# Altium PCB FPGA.PcbDoc (part 2 of 4)
Units mil, origin at the board's own origin, x right, y up, seen from the top; angles counter-clockwise.
Board outline 4000 x 2400 mil, 6 copper layers (Top Layer, InternalPlane1, MidLayer1, InternalPlane2, InternalPlane3, Bottom Layer), stack 58.8 mil thick; 235 components, 235 nets, 1406 pads, 621 vias.
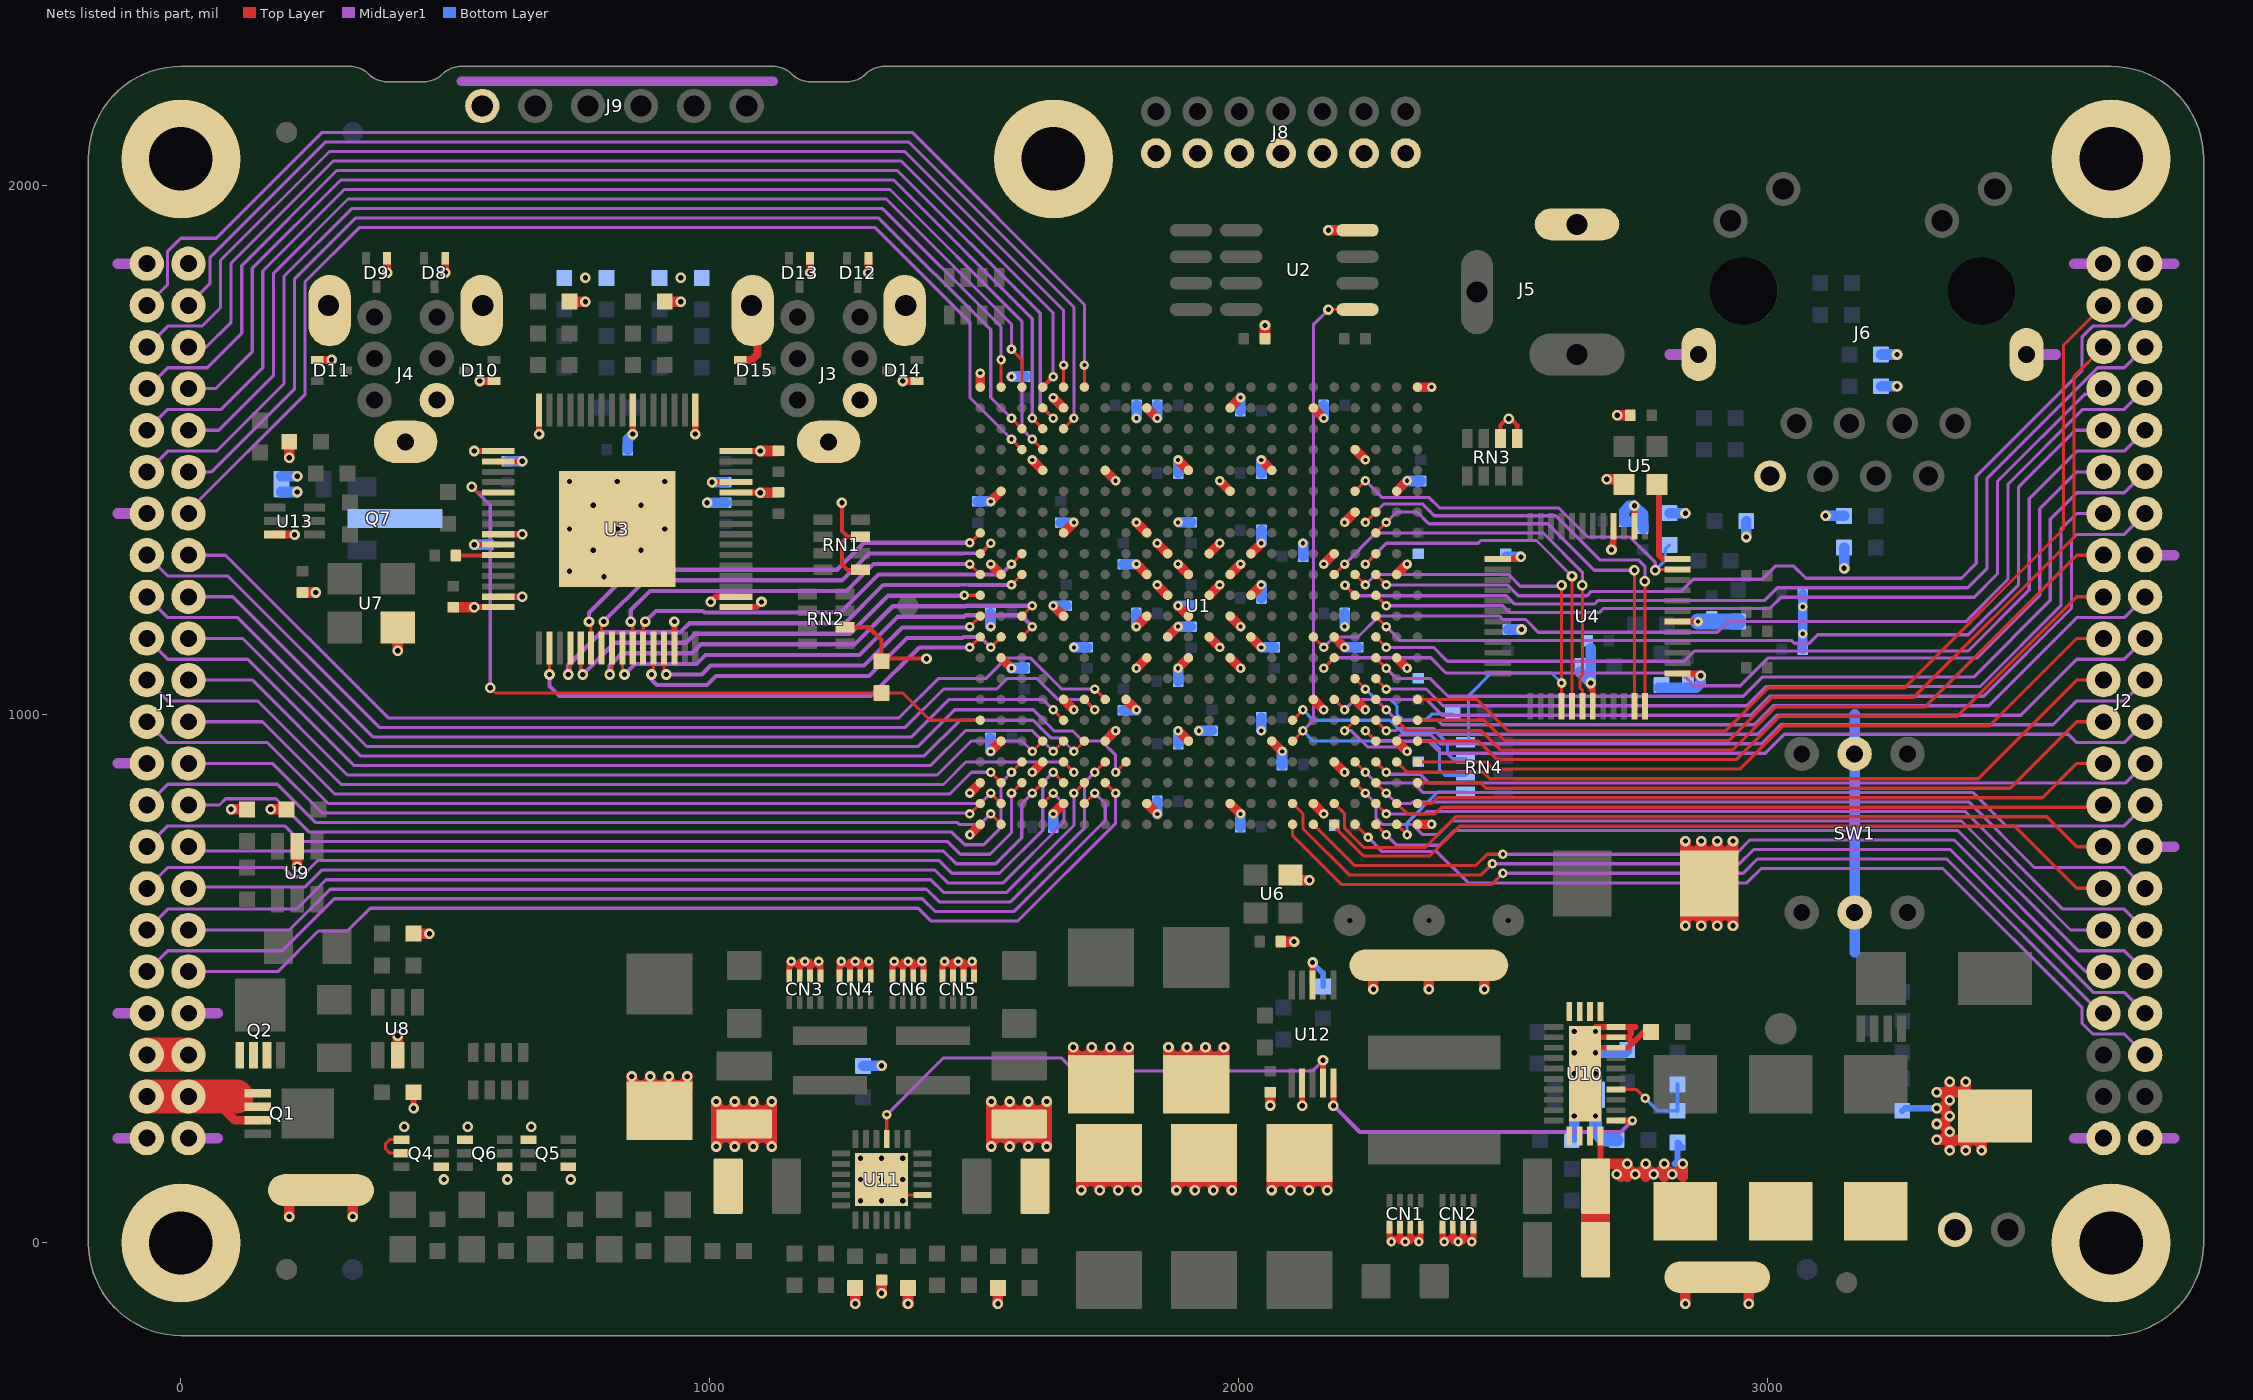
[diagram p6: the nets of this part, all layers, seen from the top]

## Via types
v1: diameter 20, hole 10, Top Layer to Bottom Layer, tented both sides, 322 vias
v2: diameter 18, hole 8, Top Layer to Bottom Layer, tented both sides, 299 vias

## Nets (pads, with @x,y where several pads share a name; then routed paths per layer and width w, separated by ;. In a path a pad name is that pad's centre, name@x,y a point inside that pad or via, vN(x,y) a via of type N, cw(c..) or ccw(c..) an arc to the next point about the centre after c; other vN are vias at no path point) (continued)
3.3V-OUT: J1.39 J1.40 Q2.1 Q2.2 Q2.3 | length 78.7
  Top Layer w65: J1.40@-64.37,355.71 J1.39@14.37,355.71
5V-OUT: J1.41 J1.42 Q1.1 Q1.2 Q1.3 | length 283.2
  Top Layer w16: 57.22,276.97 101.98,232.2 Q1.3@145,232.2 Q1.3@147.5,232.2 ; Q1.2@145,257.8 Q1.2@147.5,257.8 ; Q1.1@145,283.39 Q1.1@147.5,283.39
  Top Layer w65: J1.42@-64.37,276.97 J1.41@14.37,276.97 57.22,276.97 105,276.97
/CS: U1.Y16 U4.12 | length 884.4
  Top Layer w6: v2(2239.96,1362.48) U1.Y16@2259.65,1382.17 ; U4.12@2768.27,1015 v1(2768.27,1251.1)
  MidLayer1 w6: v2(2239.96,1362.48) 2275.02,1397.54 2347.46,1397.54 2370,1375 2600,1375 2683.8,1291.2 2757.06,1291.2 2768.27,1280 v1(2768.27,1251.1)
/ETH8: R45.1 U1.W8 | length 230.3
  Top Layer w6: U1.W8@2220.28,1067.2 v2(2239.96,1047.52)
  Bottom Layer w6: v2(2239.96,1047.52) 2259.65,1027.83 2287.17,1027.83 2299.7,1015.3 2299.7,1000.28 2310.83,989.15 2354.15,989.15 2365,1000 R45.1@2405,1000
/IRQ: RN4.8 U1.W13 U4.4 | length 932.4
  Top Layer w6: U1.W13@2220.28,1264.06 v2(2239.96,1244.37) ; U4.4@2610.79,1015 v2(2610.79,1058.9) v1@2610.79,1240
  MidLayer1 w6: v2(2239.96,1244.37) 2259.65,1264.06 2510.94,1264.06 2533,1242 v1@2610.79,1242
  Bottom Layer w6: RN4.8@2429.5,947.24 2435,952.74 2435,1035 2477.9,1077.9 2591.79,1077.9 v2(2610.79,1058.9)
  other v1: 2610.79,1244
/RD: U1.Y14 U4.5 | length 710.7
  Top Layer w6: v2(2239.96,1283.74) U1.Y14@2259.65,1303.43 ; U4.5@2630.47,1015 v1(2630.47,1261.1)
  MidLayer1 w6: v2(2239.96,1283.74) 2279.33,1323.11 2453.11,1323.11 2458.27,1328.27 2563.31,1328.27 v1(2630.47,1261.1)
/RST: R34.1 U1.A6 U3.53 | length 1401.2
  Top Layer w6: v1(550,1430) 561.1,1418.9 U3.53@600,1418.9 ; v1(585,1050) 595,1040 R34.1@1325,1040 1365,1040 1416.54,988.46 U1.A6@1511.61,988.46
  MidLayer1 w6: v1(550,1430) 585,1395 v1(585,1050)
/RST-ETH: R33.1 U1.W17 U4.23 | length 756.2
  Top Layer w6: U1.W17@2220.28,1421.54 v2(2239.96,1441.22) ; v1(2787.95,1272.2) 2789.33,1273.58 U4.23@2830,1273.58
  MidLayer1 w6: v2(2239.96,1441.22) 2271.65,1409.54 2360.46,1409.54 2380,1390 2605,1390 2660,1335 2740,1335 2787.95,1287.05 v1(2787.95,1272.2)
  Bottom Layer w6: v1(2787.95,1272.2) 2807,1291.25 2807,1312 R33.1@2815,1320
/WR: U1.V13 U4.6 | length 789.9
  Top Layer w6: U1.V13@2180.91,1264.06 v2(2200.59,1283.74) ; U4.6@2650.16,1015 2650.16,1045.4 2645.47,1050.09 2645.47,1057 2645.43,1069.96 2650.16,1074.69 v1@2650.16,1240
  MidLayer1 w6: v2(2200.59,1283.74) 2259.65,1342.8 2575.65,1342.8 2650.16,1268.29 v1(2650.16,1244) v1@2650.16,1240
/X-INIT: RN4.7 U1.T6 | length 385
  Top Layer w6: U1.T6@2102.17,988.46 v2(2121.85,1008.15)
  Bottom Layer w6: v2(2121.85,1008.15) 2141.54,988.46 2286.54,988.46 2310,965 2375,965 2395,945 2395,925.75 2405,915.75 RN4.7@2429.5,915.75
/X-PROG: RN4.5 U1.AA1 | length 185.6
  Top Layer w6: U1.AA1@2299.02,791.61 v2(2318.7,771.93)
  Bottom Layer w6: v2(2318.7,771.93) 2318.7,795 2376.46,852.76 RN4.5@2429.5,852.76
/XCS: RN4.6 U1.T5 U2.1 | length 1265.1
  Top Layer w6: U1.T5@2102.17,949.09 v2(2121.85,968.78) ; v1(2170,1765) U2.1@2225,1765
  MidLayer1 w6: v2(2121.85,968.78) 2141.54,988.46 2141.54,1736.54 v1(2170,1765)
  Bottom Layer w6: v2(2121.85,968.78) 2141.54,949.09 2365.91,949.09 2380,935 2380,895 2390.75,884.25 RN4.6@2429.5,884.25
CLK: U1.A10 U3.2 | length 940
  Top Layer w6: v1(697.05,1075) U3.2@697.05,1125 ; v2(1491.93,1126.26) U1.A10@1511.61,1145.94
  MidLayer1 w8: v1(697.05,1075) 697.05,1052.95 715,1035 1305,1035 1396.26,1126.26 v2(1491.93,1126.26)
CLK0: U11.15 U12.4 | length 976.7
  Top Layer w6: U11.15@1334.84,197 v2(1334.84,242.84)
  Top Layer w11.5: U12.4@2159.68,302.5 v1(2159.68,345.31)
  MidLayer1 w6: v2(1334.84,242.84) 1442,350 1665,350 1690,325 2139.37,325 v1(2159.68,345.31)
CLK25: U4.24 U5.3 | length 173.1
  Top Layer w11: U5.3@2791,1434 2795,1430 2795,1300.58 2802.32,1293.27 U4.24@2830,1293.27
CLK120: U10.1 U12.5 | length 668.6
  Top Layer w11: U10.1@2714,231.42 v2(2744.84,231.42)
  Top Layer w11.5: v1(2179.37,259.68) U12.5@2179.37,302.5
  MidLayer1 w8: v1(2179.37,259.68) 2229.06,210 2723.43,210 v2(2744.84,231.42)
CLK-FW: R46.2 U3.59 | length 80.3
  Top Layer w8: R46.2@520,1300 599.21,1300 U3.59@600,1300.79
CMD: U1.Y15 U4.11 | length 808
  Top Layer w6: U1.Y15@2259.65,1342.8 v2(2279.33,1362.48) ; U4.11@2748.58,1015 v1(2748.58,1272.2)
  MidLayer1 w6: v2(2279.33,1362.48) 2299.02,1382.17 2337.83,1382.17 2360,1360 2585,1360 2672.8,1272.2 v1(2748.58,1272.2)
CTL0: U1.C13 U3.4 | length 1000.1
  Top Layer w6: v1(732.42,1075) 736.42,1079 U3.4@736.42,1125 ; v2(1570.67,1244.37) U1.C13@1590.35,1264.06
  MidLayer1 w7: 1470,1244.5 1492,1244.5
  MidLayer1 w8: v1(732.42,1075) 732.42,1092.42 795,1155 945,1155 962,1172 1256,1172 1328,1244 1471,1244 ; 1491,1244 1570.3,1244 v2(1570.67,1244.37)
CTL1: U1.A12 U3.5 | length 864.9
  Top Layer w6: U3.5@756.1,1125 756.1,1079 v1(760.1,1075)
  Top Layer w7: v2(1481.61,1224.69) U1.A12@1511.61,1224.69
  MidLayer1 w8: v1(760.1,1075) 820.1,1135 955,1135 972,1152 1265,1152 1337,1224 v2@1481.61,1224
D0: U1.A15 U3.6 | length 871.2
  Top Layer w6: v1(771.79,1175) 775.79,1171 U3.6@775.79,1125 ; v2@1491.93,1323.11 U1.A15@1511.61,1342.8
  MidLayer1 w8: v1(771.79,1175) 771.79,1191.79 853,1273 1241,1273 1292,1324 v2(1491.93,1324)
D1: U1.A14 U3.7 | length 872.7
  Top Layer w6: U3.7@795.47,1125 795.47,1171 v1(799.47,1175) ; U1.A14@1511.61,1303.43 v2(1531.3,1323.11)
  MidLayer1 w7: 1480,1304 1512.19,1304 v2(1531.3,1323.11)
  MidLayer1 w8: v1(799.47,1175) 877.47,1253 1250,1253 1301,1304 1480,1304
D2: U1.C11 U3.8 | length 942.4
  Top Layer w6: v1(811.16,1075) 815.16,1079 U3.8@815.16,1125 ; U1.C11@1590.35,1185.32 v2(1610.04,1205)
  MidLayer1 w8: v1(811.16,1075) 811.16,1092.42 833.74,1115 966,1115 983,1132 1274,1132 1346,1204 1484.15,1204 1485.15,1205 v2(1610.04,1205)
D3: U1.C10 U3.9 | length 905.9
  Top Layer w6: U3.9@834.84,1125 834.84,1079 v1(838.84,1075) ; U1.C10@1590.35,1145.94 v2(1610.04,1165.63)
  MidLayer1 w8: v1(838.84,1075) 858.84,1095 975,1095 992,1112 1283,1112 1355,1184 1481,1184 1484,1187 1588.67,1187 v2(1610.04,1165.63)
D4: U1.A13 U3.10 | length 778.8
  Top Layer w6: v1(850.53,1175) 854.53,1171 U3.10@854.53,1125 ; v2(1491.93,1283.74) U1.A13@1511.61,1264.06
  MidLayer1 w8: v1(850.53,1175) 850.53,1196.53 887,1233 1259,1233 1310,1284 1491.67,1284 v2(1491.93,1283.74)
D5: U1.C14 U3.11 | length 844.7
  Top Layer w6: U3.11@874.21,1099.79 U3.11@874.21,1125 874.21,1171 v1(878.21,1175) ; v2(1570.67,1283.74) U1.C14@1590.35,1303.43
  MidLayer1 w7: 1479,1264 1550.93,1264 v2(1570.67,1283.74)
  MidLayer1 w8: v1(878.21,1175) 898.21,1195 987,1195 990,1192 1247,1192 1319,1264 1479,1264
D6: U1.B10 U3.12 | length 780.8
  Top Layer w6: v1(889.9,1075) 893.9,1079 U3.12@893.9,1125 ; v2(1531.3,1126.26) U1.B10@1550.98,1145.94
  MidLayer1 w7: 1478.06,1144 1480,1145.94 1511.61,1145.94 v2(1531.3,1126.26)
  MidLayer1 w8: v1(889.9,1075) 889.9,1065.1 900,1055 995,1055 1012,1072 1301,1072 1373,1144 1478.06,1144
D7: U1.A11 U3.13 | length 687.2
  Top Layer w6: U3.13@913.58,1125 913.58,1079 v1(917.58,1075) ; v2(1491.93,1165.63) U1.A11@1511.61,1185.32
  MidLayer1 w8: v1(917.58,1075) 985,1075 1002,1092 1292,1092 1364,1164 v2@1488.39,1164
EN: R28.1 R44.2 U10.4 | length 182.8
  Top Layer w6: U10.4@2714,290.47 2752.03,290.47 v2(2769,273.5)
  Bottom Layer w6: v2(2769,273.5) 2792.5,250 R28.1@2830,250
  Bottom Layer w8: R28.1@2830,250 R44.2@2830,300
GND: C4.2 C5.2 C6.2 C7.2 C8.2 C9.2 C11.2 C12.2 C13.2 C14.2 C15.2 C17.2 C18.2 C19.2 C20.2 C21.2 C22.2 C23.2 C24.2 C25.2 C26.2 C27.2 C28.2 C29.2 C30.2 C31.2 C32.2 C33.2 C34.2 C35.2 C36.2 C37.2 C38.2 C39.2 C40.2 C41.2 C101.2 C102.2 C103.2 C104.2 C105.2 C106.2 C107.2 C108.2 C109.2 C110.2 C111.2 C112.2 C113.2 C114.2 C115.2 C116.2 C117.2 C118.2 C119.2 C120.2 C121.2 C122.2 C123.2 C124.2 C125.2 C126.2 C127.2 C128.2 C129.2 C130.2 C131.2 C132.2 C133.2 C134.2 C135.2 C136.2 C137.2 C138.2 C139.2 C140.2 C141.2 C142.2 C143.2 C144.2 C145.2 C146.2 C147.2 C148.2 C149.2 C150.2 C151.2 C152.2 C153.2 C154.2 C155.2 C156.2 C157.2 C158.2 C159.2 C160.2 C161.2 C162.2 CN1.1 CN1.2 CN1.3 CN1.4 CN2.1 CN2.2 CN2.3 CN2.4 CN3.1 CN3.2 CN3.3 CN3.4 CN4.1 CN4.2 CN4.3 CN4.4 CN5.1 CN5.2 CN5.3 CN5.4 CN6.1 CN6.2 CN6.3 CN6.4 D1.2 D8.1 D9.1 D10.1 D11.1 D12.1 D13.1 D14.1 D15.1 J1.1 J1.2 J1.14 J1.26 J1.37 J1.38 J1.43 J1.44 J2.1 J2.2 J2.15 J2.29 J2.43 J2.44 J3.2 J3.7 J3.8 J3.9 J4.2 J4.7 J4.8 J4.9 J5.3 J6.8 J6.13 J6.14 J7.2 J8.1 J8.3 J8.5 J8.7 J8.9 J8.11 J8.13 J9.1 M1.1 M2.1 M3.1 M4.1 M5.1 pad.0@265,100 pad.0@1285,80 pad.0@1285,120 pad.0@1285,160 pad.0@1325,80 pad.0@1325,120 pad.0@1325,160 pad.0@1365,80 pad.0@1365,120 pad.0@1365,160 pad.0@2360,525 pad.0@2635,240 pad.0@2635,320 pad.0@2635,360 pad.0@2635,400 pad.0@2675,240 pad.0@2675,320 pad.0@2675,360 pad.0@2675,400 pad.0@2905,-65 pad.1 Q4.1 Q4.4 Q4.5 Q5.1 Q5.4 Q6.1 Q6.4 Q7.3 R9.2 R10.2 R11.2 R25.2 R27.2 R28.2 R29.2 R30.2 R32.2 R33.2 R34.2 R38.2 R39.2 R40.2 RN1.1 RN1.3 RN2.2 RN3.5 RN3.6 SW1.2 SW1.5 U1.A1 U1.A3 U1.A22 U1.AA5 U1.AA9 U1.AA13 U1.AA17 U1.AB1 U1.AB22 U1.B5 U1.B9 U1.B13 U1.B17 U1.D4 U1.D18 U1.E2 U1.E7 U1.E11 U1.E15 U1.E21 U1.G5 U1.G18 U1.H7 U1.J2 U1.J9 U1.J11 U1.J13 U1.J15 U1.J21 U1.K10 U1.K12 U1.K14 U1.L5 U1.L9 U1.L11 U1.L13 U1.L18 U1.M10 U1.M12 U1.M14 U1.N2 U1.N9 U1.N11 U1.N13 U1.N17 U1.N21 U1.P10 U1.P12 U1.P14 U1.R5 U1.R18 U1.U2 U1.U7 U1.U21 U1.V4 U1.V10 U1.V14 U1.W7 U1.W16 U1.W19 U2.4 U3.14 U3.17 U3.18 U3.28 U3.29 U3.32 U3.33 U3.39 U3.48 U3.49 U3.50 U3.57 U3.58 U3.63 U3.64 U3.65 U4.7 U4.13 U4.18 U4.26 U4.28 U4.37 U5.2 U6.2 U7.2 U8.2 U9.2 U10.8 U10.9 U10.10 U10.11 U10.12 U10.13 U10.14 U10.25 U10.26 U10.27 U10.28 U10.29 U11.8 U11.25 U12.2 U12.8 U13.6 | length 16369.9
  Top Layer w6: Q4.5@417.5,170 395,170 387,178 387,187.59 395,195.59 Q4.4@417.5,195.59 ; U11.25@1364,90.47 U11.8@1402,90.47
  Top Layer w8: v1(1250,1400) 1250,1346.5 1260.75,1335.75 ; RN2.2@1255.5,1164.25 1300.75,1164.25 1325,1140 R34.2@1325,1100 1330,1105 v1(1410,1105) ; RN1.1@1285.5,1272.76 1260.75,1272.76 1250,1283.5 1250,1325 1260.75,1335.75 ; RN1.3@1285.5,1335.75 1260.75,1335.75 ; RN3.6@2495.34,1519.26 2495.34,1546.52 2507.58,1558.76 v1(2511.08,1558.76) 2514.59,1558.76 2526.83,1546.52 RN3.5@2526.83,1519.26
  Top Layer w11: CN3.4@1150.47,505 v2@1150.47,532.26 ; 1150.47,517.5 cw(c1160.32,517.5) 1170.16,517.5 cw(c1180,517.5) 1189.84,517.5 cw(c1199.69,517.5) 1209.53,517.5 ; CN3.3@1170.16,505 1170.16,532.26 ; CN3.2@1189.84,505 1189.84,532.26 ; CN3.1@1209.53,505 v2@1209.53,532.26 ; CN4.4@1245.47,505 v2@1245.47,532.26 ; 1245.47,517.5 cw(c1255.32,517.5) 1265.16,517.5 cw(c1275,517.5) 1284.84,517.5 cw(c1294.69,517.5) 1304.53,517.5 ; CN4.3@1265.16,505 1265.16,532.26 ; CN4.2@1284.84,505 1284.84,532.26 ; CN4.1@1304.53,505 v2@1304.53,532.26 ; CN6.4@1345.47,505 v2@1345.47,532.26 ; 1345.47,517.5 cw(c1355.32,517.5) 1365.16,517.5 cw(c1375,517.5) 1384.84,517.5 cw(c1394.69,517.5) 1404.53,517.5 ; CN6.3@1365.16,505 1365.16,532.26 ; CN6.2@1384.84,505 1384.84,532.26 ; CN6.1@1404.53,505 v2@1404.53,532.26 ; CN5.4@1440.47,505 v2@1440.47,532.26 ; 1440.47,517.5 cw(c1450.32,517.5) 1460.16,517.5 cw(c1470,517.5) 1479.84,517.5 cw(c1489.69,517.5) 1499.53,517.5 ; CN5.3@1460.16,505 1460.16,532.26 ; CN5.2@1479.84,505 1479.84,532.26 ; CN5.1@1499.53,505 v2@1499.53,532.26 ; v2@2285.47,2.74 CN1.1@2285.47,30 ; CN1.1@2285.47,17.5 ccw(c2295.31,17.5) 2305.16,17.5 ccw(c2315,17.5) 2324.84,17.5 ccw(c2334.68,17.5) CN1.4@2344.53,17.5 ; 2305.16,2.74 CN1.2@2305.16,30 ; 2324.84,2.74 CN1.3@2324.84,30 ; v2@2344.53,2.74 CN1.4@2344.53,30 ; v2@2385.47,2.74 CN2.1@2385.47,30 ; CN2.1@2385.47,17.5 ccw(c2395.31,17.5) 2405.16,17.5 ccw(c2415,17.5) 2424.84,17.5 ccw(c2434.68,17.5) CN2.4@2444.53,17.5 ; 2405.16,2.74 CN2.2@2405.16,30 ; 2424.84,2.74 CN2.3@2424.84,30 ; v2@2444.53,2.74 CN2.4@2444.53,30 ; U4.37@2490,1293.27 2517.97,1293.27 ; v1@2531.65,1301.17 2517.97,1293.27 ; v1@2533.9,1293.27 2517.97,1293.27 ; v1@2661.95,1056.65 2669.84,1042.97 ; U4.7@2669.84,1015 2669.84,1042.97 ; v1@2669.84,1058.9 2669.84,1042.97 ; U10.29@2675,369.21 U10.8@2714,369.21 2732.5,369.21 ccw(c2732.5,379.06) 2739.46,372.1 ; U10.29@2675,388.9 U10.9@2714,388.9 2732.5,388.9 ; U10.29@2675,408.58 U10.10@2714,408.58 2732.5,408.58 ; C27.2@2684.53,150 U10.28@2684.53,202 ; v1@2701.32,1313.35 2709.21,1327.03 ; v1@2709.21,1311.1 U4.28@2709.21,1355 ; U4.26@2748.58,1355 v1(2748.58,1393.9) ; 2751,408.58 2732.5,408.58 ; C13.2@2766.36,399 2739.46,372.1 ; U4.13@2830,1076.73 2857.97,1076.73 ; U4.18@2830,1175.16 v2(2868.9,1175.16) ; v1@2871.65,1068.83 2857.97,1076.73 ; v1@2873.9,1076.73 2857.97,1076.73 ; 2732.5,388.9 ccw(c2732.5,398.74) 2732.5,408.58 ; 2732.5,388.9 cw(c2732.5,379.06) 2739.46,372.1
  Top Layer w11.5: v1(554.53,1202.36) U3.64@600,1202.36 ; v1(554.53,1320.47) U3.58@600,1320.47 ; v1(554.53,1497.64) U3.49@600,1497.64 ; U3.63@600,1222.05 v1(645.47,1222.05) ; U3.57@600,1340.16 v1(645.47,1340.16) ; U3.50@600,1477.95 v1(645.47,1477.95) ; v1(677.36,1529.53) U3.48@677.36,1575 ; v1(854.53,1529.53) U3.39@854.53,1575 ; U3.14@933.27,1125 v1(933.27,1175) ; v1(972.64,1529.53) U3.33@972.64,1575 ; v1(1002,1212.2) 1011.84,1222.05 U3.18@1050,1222.05 ; v1(1004.53,1438.58) U3.29@1050,1438.58 ; U3.17@1050,1202.36 1088.16,1202.36 v1(1098,1212.2) ; U3.28@1050,1418.9 v1(1095.47,1418.9) ; U3.32@1050,1497.64 v1(1095.47,1497.64) ; v1(2120.31,259.69) U12.2@2120.31,302.5 ; U12.8@2140,487.5 v1(2140,530.31)
  Top Layer w12: v1(440,255) C17.2@440,285
  Top Layer w15: U13.6@177.5,1339.41 v1(215,1339.41) ; D11.1@258,1670 v1(285,1670) ; v1(390,1835) D9.1@390,1862 ; v1(500,1835) D8.1@500,1862 ; v1(565,1630) D10.1@592,1630 ; D15.1@1058,1670 1080,1670 1090,1680 J3.8@1090,1766.14 ; v1(1190,1835) D13.1@1190,1862 ; v1(1300,1835) D12.1@1300,1862 ; v1(1365,1630) D14.1@1392,1630
  Top Layer w18: v2@1491.93,771.93 U1.A1@1511.61,791.61 ; v2(1491.93,850.67) U1.A3@1511.61,870.35 ; U1.A22@1511.61,1618.39 v2(1511.61,1645) ; v2(1531.3,929.41) U1.B5@1550.98,949.09 ; v2(1531.3,1283.74) U1.B13@1550.98,1264.06 ; v2(1531.3,1401.85) U1.B17@1550.98,1421.54 ; U1.B9@1550.98,1106.57 v2(1570.67,1086.89) ; v2(1610.04,890.04) U1.D4@1629.72,909.72 ; v2(1610.04,1480.59) U1.D18@1629.72,1460.91 ; v2(1649.41,811.3) U1.E2@1669.09,830.98 ; v2(1649.41,1205) U1.E11@1669.09,1185.32 ; v2(1649.41,1598.7) U1.E21@1669.09,1579.02 ; U1.E7@1669.09,1027.83 v2(1688.78,1008.15) ; U1.E15@1669.09,1342.8 v2(1688.78,1362.48) ; U1.G5@1747.83,949.09 v2(1767.52,968.78) ; U1.G18@1747.83,1460.91 v2(1767.52,1441.22) ; U1.H7@1787.2,1027.83 v2(1806.89,1008.15) ; v2(1806.89,1086.89) U1.J9@1826.57,1106.57 ; v2(1806.89,1165.63) U1.J11@1826.57,1185.32 ; v2(1806.89,1283.74) U1.J13@1826.57,1264.06 ; v2(1806.89,1362.48) U1.J15@1826.57,1342.8 ; U1.J2@1826.57,830.98 v2(1846.26,811.3) ; U1.J21@1826.57,1579.02 v2(1846.26,1559.33) ; v2(1846.26,1244.37) U1.K12@1865.94,1224.69 ; v2(1846.26,1323.11) U1.K14@1865.94,1303.43 ; U1.K10@1865.94,1145.94 v2(1885.63,1165.63) ; v2(1885.63,968.78) U1.L5@1905.31,949.09 ; v2(1885.63,1086.89) U1.L9@1905.31,1106.57 ; v2(1885.63,1205) U1.L11@1905.31,1185.32 ; v2(1885.63,1283.74) U1.L13@1905.31,1264.06 ; v2(1885.63,1480.59) U1.L18@1905.31,1460.91 ; U1.M10@1944.68,1145.94 v2(1964.37,1126.26) ; U1.M12@1944.68,1224.69 v2(1964.37,1244.37) ; U1.M14@1944.68,1303.43 v2(1964.37,1323.11) ; v2(1964.37,1441.22) U1.N17@1984.06,1421.54 ; U1.N2@1984.06,830.98 v2(2003.74,811.3) ; U1.N9@1984.06,1106.57 v2(2003.74,1086.89) ; U1.N11@1984.06,1185.32 v2(2003.74,1165.63) ; U1.N13@1984.06,1264.06 v2(2003.74,1283.74) ; U1.N21@1984.06,1579.02 v2(2003.74,1598.7) ; U1.P10@2023.43,1145.94 v2(2043.11,1126.26) ; U1.P12@2023.43,1224.69 v2(2043.11,1244.37) ; U1.P14@2023.43,1303.43 v2(2043.11,1323.11) ; v2(2043.11,1480.59) U1.R18@2062.8,1460.91 ; U1.R5@2062.8,949.09 v2(2082.48,929.41) ; U1.U2@2141.54,830.98 v2(2161.22,811.3) ; U1.U7@2141.54,1027.83 v2(2161.22,1008.15) ; U1.U21@2141.54,1579.02 v2(2161.22,1559.33) ; v2(2161.22,1283.74) U1.V14@2180.91,1303.43 ; U1.V4@2180.91,909.72 v2(2200.59,890.04) ; U1.V10@2180.91,1145.94 v2(2200.59,1126.26) ; v2(2200.59,1362.48) U1.W16@2220.28,1382.17 ; U1.W7@2220.28,1027.83 v2(2239.96,1008.15) ; U1.W19@2220.28,1500.28 v2(2239.96,1480.59) ; U1.AA5@2299.02,949.09 v2(2318.7,929.41) ; U1.AA9@2299.02,1106.57 v2(2318.7,1086.89) ; U1.AA13@2299.02,1264.06 v2(2318.7,1283.74) ; U1.AA17@2299.02,1421.54 v2(2318.7,1441.22) ; U1.AB1@2338.39,791.61 v2(2365,791.61) ; U1.AB22@2338.39,1618.39 v2(2365,1618.39)
  Top Layer w20: v1(95,820) C9.2@125,820 ; v1(170,820) C18.2@200,820 ; v1(205,50) pad.0@205,85 ; v1(205,1485) R25.2@205,1515 ; v1(220,711.5) U9.2@220,750 ; C109.2@230,1230 v1(255,1230) ; v1(325,50) pad.0@325,75 ; U8.2@410,355 v1(410,392) ; v1(410,1120) U7.2@410,1164 ; C8.2@440,585 v1(470,585) ; C105.2@515,1202 515.36,1202.36 v1(554.53,1202.36) ; C15.2@735,1780 v1(765,1780) ; C32.2@852.5,290 v1(852.5,315) ; C32.2@887.5,290 v1(887.5,315) ; C14.2@915,1780 v1(945,1780) ; C32.2@922.5,290 v1@922.5,314.94 ; v1(922.5,315) v1@922.5,314.94 ; C32.2@957.5,290 v1(957.5,315) ; C30.2@1047.5,207.5 v1(1047.5,182.5) ; C30.2@1047.5,242.5 v1(1047.5,267.5) ; C30.2@1082.5,207.5 v1(1082.5,182.5) ; C30.2@1082.5,242.5 v1(1082.5,267.5) ; v1(1095.47,1418.9) 1129.69,1418.9 C108.2@1130,1419.21 ; v1(1095.47,1497.64) C104.2@1127.64,1497.64 ; v1(1275,-115) R40.2@1275,-85 ; v1(1325,-95) C101.2@1325,-70 ; v1(1375,-115) R38.2@1375,-85 ; v1(1545,-115) R30.2@1545,-85 ; C31.2@1567.5,207.5 v1(1567.5,182.5) ; C31.2@1567.5,242.5 v1(1567.5,267.5) ; C31.2@1602.5,207.5 v1(1602.5,182.5) ; C31.2@1602.5,242.5 v1(1602.5,267.5) ; C34.2@1687.5,345 v1(1687.5,370) ; C36.2@1702.5,125 v1(1702.5,100) ; C34.2@1722.5,345 v1(1722.5,370) ; C36.2@1737.5,125 v1(1737.5,100) ; C34.2@1757.5,345 v1(1757.5,370) ; C36.2@1772.5,125 v1(1772.5,100) ; C34.2@1792.5,345 v1(1792.5,370) ; C36.2@1807.5,125 v1(1807.5,100) ; C33.2@1867.5,345 v1(1867.5,370) ; C37.2@1882.5,125 v1(1882.5,100) ; C33.2@1902.5,345 v1(1902.5,370) ; C37.2@1917.5,125 v1(1917.5,100) ; C33.2@1937.5,345 v1(1937.5,370) ; C37.2@1952.5,125 v1(1952.5,100) ; C33.2@1972.5,345 v1(1972.5,370) ; C37.2@1987.5,125 v1(1987.5,100) ; C106.2@2050,1710 v1(2050,1735) ; v1(2060,260) C102.2@2060,285 ; C38.2@2062.5,125 v1(2062.5,100) ; C107.2@2080,570 v1(2105,570) ; C38.2@2097.5,125 v1(2097.5,100) ; U6.2@2101,686 v1(2134,686) ; C38.2@2132.5,125 v1(2132.5,100) ; C38.2@2167.5,125 v1(2167.5,100) ; v1(2170,1915) U2.4@2230,1915 ; v1(2255,480) pad.0@2255,505 ; v1(2360,480) pad.0@2360,505 ; v1(2465,480) pad.0@2465,505 ; C27.2@2695,150 v1(2735,150) ; v1(2696,1444) U5.2@2729,1444 ; v1(2716,1565) C103.2@2741,1565 ; v1@2722.5,125 2722.5,150 ; 2735,125 v1(2735,150) ; 2770,125 v1(2770,150) ; 2805,125 v1(2805,150) ; 2840,125 v1(2840,150) ; v1(2845,-115) pad.0@2845,-80 ; v1(2845,600) v1@2845,605 ; C35.2@2845,625 v1@2845,605 ; C35.2@2845,735 v1@2845,755 ; v1(2845,760) v1@2845,755 ; v1(2875,600) v1@2875,605 ; v1(2875,760) v1@2875,755 ; v1(2905,600) v1@2905,605 ; v1(2905,760) v1@2905,755 ; v1(2935,600) v1@2935,605 ; C35.2@2935,625 v1@2935,605 ; C35.2@2935,735 v1@2935,755 ; v1(2935,760) v1@2935,755 ; v1(2965,-115) pad.0@2965,-90 ; v1(3320,195) v1@3325,195 ; v1(3320,225) v1@3325,225 ; v1(3320,255) v1@3325,255 ; v1(3320,285) v1@3325,285 ; v1(3345,175) v1@3345,180 ; 3345,200 v1@3345,180 ; 3345,280 v1@3345,300 ; 3345,285 v1@3325,285 ; v1(3345,305) v1@3345,300 ; v1(3375,175) v1@3375,180 ; D1.2@3375,200 v1@3375,180 ; D1.2@3375,280 v1@3375,300 ; v1(3375,305) v1@3375,300 ; v1(3405,175) v1@3405,180 ; D1.2@3405,200 v1@3405,180 ; v1(852.5,315) ccw(c870,315) v1(887.5,315) ; v1(852.5,315) ccw(c870,315) v1(887.5,315) ; v1(887.5,315) ccw(c905,315) v1@922.5,314.94 ; v1(887.5,315) ccw(c905,315) v1@922.5,314.94 ; v1@922.5,314.94 ccw(c940,315) v1(957.5,315) ; v1@922.5,314.94 ccw(c940,315) v1(957.5,315) ; v1(1012.5,182.5) cw(c1030,182.5) v1(1047.5,182.5) ; v1(1012.5,182.5) cw(c1030,182.5) v1(1047.5,182.5) ; v1(1012.5,182.5) v1(1012.5,267.5) ; v1(1012.5,267.5) ccw(c1030,267.5) v1(1047.5,267.5) ; v1(1012.5,267.5) ccw(c1030,267.5) v1(1047.5,267.5) ; v1(1047.5,182.5) cw(c1065,182.5) v1(1082.5,182.5) ; v1(1047.5,182.5) cw(c1065,182.5) v1(1082.5,182.5) ; v1(1047.5,267.5) ccw(c1065,267.5) v1(1082.5,267.5) ; v1(1047.5,267.5) ccw(c1065,267.5) v1(1082.5,267.5) ; v1(1082.5,182.5) cw(c1100,182.5) v1(1117.5,182.5) ; v1(1082.5,182.5) cw(c1100,182.5) v1(1117.5,182.5) ; v1(1082.5,267.5) ccw(c1100,267.5) v1(1117.5,267.5) ; v1(1082.5,267.5) ccw(c1100,267.5) v1(1117.5,267.5) ; v1(1117.5,182.5) v1(1117.5,267.5) ; v1(1532.5,182.5) cw(c1550,182.5) v1(1567.5,182.5) ; v1(1532.5,182.5) cw(c1550,182.5) v1(1567.5,182.5) ; v1(1532.5,182.5) v1(1532.5,267.5) ; v1(1532.5,267.5) ccw(c1550,267.5) v1(1567.5,267.5) ; v1(1532.5,267.5) ccw(c1550,267.5) v1(1567.5,267.5) ; v1(1567.5,182.5) cw(c1585,182.5) v1(1602.5,182.5) ; v1(1567.5,182.5) cw(c1585,182.5) v1(1602.5,182.5) ; v1(1567.5,267.5) ccw(c1585,267.5) v1(1602.5,267.5) ; v1(1567.5,267.5) ccw(c1585,267.5) v1(1602.5,267.5) ; v1(1602.5,182.5) cw(c1620,182.5) v1(1637.5,182.5) ; v1(1602.5,182.5) cw(c1620,182.5) v1(1637.5,182.5) ; v1(1602.5,267.5) ccw(c1620,267.5) v1(1637.5,267.5) ; v1(1602.5,267.5) ccw(c1620,267.5) v1(1637.5,267.5) ; v1(1637.5,182.5) v1(1637.5,267.5) ; v1(1687.5,370) ccw(c1705,370) v1(1722.5,370) ; v1(1687.5,370) ccw(c1705,370) v1(1722.5,370) ; v1(1702.5,100) cw(c1720,100) v1(1737.5,100) ; v1(1702.5,100) cw(c1720,100) v1(1737.5,100) ; v1(1722.5,370) ccw(c1740,370) v1(1757.5,370) ; v1(1722.5,370) ccw(c1740,370) v1(1757.5,370) ; v1(1737.5,100) cw(c1755,100) v1(1772.5,100) ; v1(1737.5,100) cw(c1755,100) v1(1772.5,100) ; v1(1757.5,370) ccw(c1775,370) v1(1792.5,370) ; v1(1757.5,370) ccw(c1775,370) v1(1792.5,370) ; v1(1772.5,100) cw(c1790,100) v1(1807.5,100) ; v1(1772.5,100) cw(c1790,100) v1(1807.5,100) ; v1(1867.5,370) ccw(c1885,370) v1(1902.5,370) ; v1(1867.5,370) ccw(c1885,370) v1(1902.5,370) ; v1(1882.5,100) cw(c1900,100) v1(1917.5,100) ; v1(1882.5,100) cw(c1900,100) v1(1917.5,100) ; v1(1902.5,370) ccw(c1920,370) v1(1937.5,370) ; v1(1902.5,370) ccw(c1920,370) v1(1937.5,370) ; v1(1917.5,100) cw(c1935,100) v1(1952.5,100) ; v1(1917.5,100) cw(c1935,100) v1(1952.5,100) ; v1(1937.5,370) ccw(c1955,370) v1(1972.5,370) ; v1(1937.5,370) ccw(c1955,370) v1(1972.5,370) ; v1(1952.5,100) cw(c1970,100) v1(1987.5,100) ; v1(1952.5,100) cw(c1970,100) v1(1987.5,100) ; v1(2062.5,100) cw(c2080,100) v1(2097.5,100) ; v1(2062.5,100) cw(c2080,100) v1(2097.5,100) ; v1(2097.5,100) cw(c2115,100) v1(2132.5,100) ; v1(2097.5,100) cw(c2115,100) v1(2132.5,100) ; v1(2132.5,100) cw(c2150,100) v1(2167.5,100) ; v1(2132.5,100) cw(c2150,100) v1(2167.5,100) ; v1(2735,150) ccw(c2752.5,150) v1(2770,150) ; v1(2735,150) ccw(c2752.5,150) v1(2770,150) ; v1(2770,150) ccw(c2787.5,150) v1(2805,150) ; v1(2770,150) ccw(c2787.5,150) v1(2805,150) ; v1(2805,150) ccw(c2822.5,150) v1(2840,150) ; v1(2805,150) ccw(c2822.5,150) v1(2840,150) ; v1@2845,605 cw(c2860,605) v1@2875,605 ; v1@2845,755 ccw(c2860,755) v1@2875,755 ; v1@2875,605 cw(c2890,605) v1@2905,605 ; v1@2875,755 ccw(c2890,755) v1@2905,755 ; v1@2905,605 cw(c2920,605) v1@2935,605 ; v1@2905,755 ccw(c2920,755) v1@2935,755 ; v1@3325,195 ccw(c3325,210) v1@3325,225 ; v1@3325,195 3345,195 v1@3325,195 ; v1@3325,225 ccw(c3325,240) v1@3325,255 ; v1@3325,255 ccw(c3325,270) v1@3325,285 ; v1@3345,180 cw(c3360,180) v1@3375,180 ; v1@3345,300 ccw(c3360,300) v1@3375,300 ; v1@3375,180 cw(c3390,180) v1@3405,180
  Top Layer w55: C26.2@2675,-10 C27.2@2675,110
  MidLayer1 w18: 530,2196.5 1120,2196.5
  MidLayer1 w20: -119.33,198.23 J1.44@-64.37,198.23 ; -119.33,434.45 J1.38@-64.37,434.45 ; -119.33,906.89 J1.26@-64.37,906.89 ; -119.33,1379.33 J1.14@-64.37,1379.33 ; -119.33,1851.77 J1.2@-64.37,1851.77 ; J1.43@14.37,198.23 69.33,198.23 ; J1.37@14.37,434.45 69.33,434.45 ; 2815.04,1680 J6.14@2870,1680 ; J6.13@3490,1680 3544.96,1680 ; 3580.67,198.23 J2.44@3635.63,198.23 ; 3580.67,1851.77 J2.2@3635.63,1851.77 ; J2.43@3714.37,198.23 3769.33,198.23 ; J2.29@3714.37,749.41 3769.33,749.41 ; J2.15@3714.37,1300.59 3769.33,1300.59 ; J2.1@3714.37,1851.77 3769.33,1851.77
  Bottom Layer w10: v1(2140,530.31) 2139.68,530 2160,509.68 C6.2@2160,485
  Bottom Layer w11: R39.2@2630,195 R39.2@2635,200
  Bottom Layer w12: 2825,150 v1(2840,150) ; 2830,150 R28.2@2830,190 R28.2@2839,181 ; R11.2@3255,250 3260,255 v1(3320,255)
  Bottom Layer w18: C161.2@3067,1122.5 v2(3067,1152) v2(3067,1203) C162.2@3067,1227.5
  Bottom Layer w20: C25.2@190,1420 v1(220,1420) ; C25.2@190,1450 v1(220,1450) ; v1(554.53,1320.47) 555,1320 C153.2@580,1320 ; C152.2@617,1478.27 645.16,1478.27 v1(645.47,1477.95) ; C151.2@845,1500 845,1520 v1(854.53,1529.53) ; v1(995,1400) C149.2@1030,1400 ; v1(1004.53,1438.58) 1029.69,1438.58 C150.2@1030,1438.27 ; R32.2@1290,335 v1(1325,335) ; C110.2@1506.61,1402.17 v2@1530.98,1402.17 ; v2@1530.98,929.72 C113.2@1530.98,954.09 ; v2@1530.98,1165.94 C112.2@1530.98,1190.31 ; v2@1570.35,1087.2 C114.2@1594.72,1087.2 ; v2@1571.61,1638.39 C111.2@1595.35,1638.39 ; C115.2@1649.72,786.61 v2@1649.72,810.35 ; v2@1650.35,1204.68 C116.2@1674.09,1204.68 ; C117.2@1664.09,1362.17 v2@1687.83,1362.17 ; v2@1689.09,1126.57 C121.2@1713.46,1126.57 ; C119.2@1782.2,1283.43 v2@1806.57,1283.43 ; C122.2@1782.52,1007.52 v2@1806.26,1007.52 ; v2@1806.57,1165.94 C123.2@1806.57,1190.32 ; v2@1807.2,1559.65 C118.2@1807.2,1584.02 ; v2@1845.94,810.98 C126.2@1845.94,835.35 ; v2@1845.94,1560.28 C124.2@1845.94,1584.02 ; C120.2@1885.63,1062.52 v2(1885.63,1086.89) ; v2(1885.63,1165.63) C129.2@1910,1165.63 ; C131.2@1885.94,944.09 v2@1885.94,967.83 ; v2@1885.94,1204.69 C130.2@1910.31,1204.69 ; C125.2@1885.94,1455.91 v2@1885.94,1480.28 ; v2@1886.57,1362.8 C127.2@1910.31,1362.8 ; v2@1925.94,968.46 C128.2@1949.68,968.46 ; C140.2@2003.11,786.93 v2@2003.11,810.67 ; C135.2@2003.42,1574.02 v2@2003.43,1597.76 ; v2@2042.8,969.72 C137.2@2042.79,993.46 ; v2@2043.43,1126.57 C136.2@2067.8,1126.57 ; C132.2@2043.43,1219.69 v2@2043.43,1243.43 ; v2@2043.43,1324.06 C133.2@2043.43,1347.8 ; C134.2@2043.42,1455.91 v2@2043.43,1480.28 ; C139.2@2082.16,904.72 v2@2082.17,928.46 ; C138.2@2122.17,1298.43 v2@2122.17,1322.17 ; v2@2160.91,1560.28 C141.2@2160.91,1584.02 ; v2@2200.91,1166.57 C142.2@2200.91,1190.32 ; v2@2201.54,1126.57 C144.2@2225.28,1126.57 ; v2@2320.31,1440.91 C148.2@2344.68,1440.91 ; C154.2@2506.27,1297.27 v1(2533.9,1297.27) ; C156.2@2510,1160 v1(2535,1160) ; R39.2@2635,200 pad.0@2635,240 ; C22.2@2645,1079.74 v1(2665.84,1058.9) 2665.84,1124.16 ; pad.0@2675,360 2730,360 R27.2@2735,365 ; C158.2@2729,1364 2763.74,1364 ; C158.2@2729,1365 2729,1384 2738.9,1393.9 v1(2748.58,1393.9) 2765,1377.48 C155.2@2765,1351 ; C21.2@2795,1050 2865,1050 2873.9,1058.9 v1(2873.9,1072.73) ; R33.2@2815,1380 v1(2845,1380) ; v1(2960,1335) R29.2@2960,1365 ; v1(3110,1375) C12.2@3145,1375 ; v1@3145,1275 C20.2@3145,1315 ; 3165,550 3165,1000 ; C11.2@3215,1620 v1(3245,1620) ; C23.2@3215,1680 v1(3245,1680)
  Bottom Layer w24: pad.0@2675,240 pad.0@2675,320
  Bottom Layer w25: pad.0@2675,240 2675,210 2690,195 C7.2@2715,195
  Bottom Layer w30: v2@2869.06,1175 C19.2@2945,1175
  other v1: 497.5,120 617.5,120 737.5,120 2715,130 2750,130 2785,130 2820,130 3345,210 422.5,220 542.5,220 662.5,220 3345,240 3345,270 3145,1276 2705.21,1311.1 765,1825 945,1825
  other v2: 2389,2.5 2415,2.5 2441,2.5 2289,2.5 2315,2.5 2341,2.5 1154,532.5 1180,532.5 1206,532.5 1249,532.5 1275,532.5 1301,532.5 1349,532.5 1375,532.5 1401,532.5 1444,532.5 1470,532.5 1496,532.5 1492,772 1925,968.46 2043.11,968.78 1688.78,1126.26 1531.3,1165.63 2200.59,1165.63 2121.85,1323.11 1885.63,1362.48 1806.89,1559.33 1570.67,1638.07
IO1-1: J1.3 U1.E20 | length 2198.6
  Top Layer w6: U1.E20@1669.09,1539.65 v2(1688.78,1559.33)
  MidLayer1 w6: J1.3@14.37,1773.03 55,1813.66 55,1863 274,2082 1376,2082 1688.78,1769.22 v2(1688.78,1559.33)
IO1-2: J1.4 U1.F22 | length 2235.9
  Top Layer w6: U1.F22@1708.46,1618.39 v2(1708.46,1660)
  MidLayer1 w6: J1.4@-64.37,1773.03 -25,1812.4 -25,1875 0,1900 67,1900 267,2100 1383,2100 1708.46,1774.54 v2(1708.46,1660)
IO1-3: J1.5 U1.D22 | length 2113.6
  Top Layer w8: U1.D22@1629.72,1618.39 v2(1649.41,1638.07)
  MidLayer1 w6: J1.5@14.37,1694.29 48.03,1694.29 95,1741.26 95,1853 288,2046 1362,2046 1649.41,1758.59 v2(1649.41,1638.07)
IO1-4: J1.6 U1.E22 | length 2208.8
  Top Layer w6: U1.E22@1669.09,1618.39 v2(1669.09,1660)
  MidLayer1 w6: J1.6@-64.37,1694.29 -25,1733.66 40,1733.66 75,1768.66 75,1858 281,2064 1369,2064 1669.09,1763.91 v2(1669.09,1660)
IO1-5: J1.7 U1.D20 | length 2176.6
  Top Layer w6: v2(1610.04,1559.33) U1.D20@1629.72,1539.65
  MidLayer1 w6: J1.7@14.37,1615.55 65.55,1615.55 135,1685 135,1843 302,2010 1348,2010 1610.04,1747.96 v2(1610.04,1559.33)
IO1-6: J1.8 U1.D21 | length 2283.6
  Top Layer w6: U1.D21@1629.72,1579.02 v2(1649.41,1559.33)
  MidLayer1 w6: J1.8@-64.37,1615.55 -25,1654.92 49.92,1654.92 115,1720 115,1848 295,2028 1355,2028 1625,1758 1625,1583.74 v2(1649.41,1559.33)
IO1-7: J1.9 U1.C22 | length 2075.6
  Top Layer w6: v2(1570.67,1690) 1590.35,1670.32 U1.C22@1590.35,1618.39
  MidLayer1 w6: J1.9@14.37,1536.81 71.81,1536.81 175,1640 175,1833 316,1974 1334,1974 1570.67,1737.33 v2(1570.67,1690)
IO1-8: J1.10 U1.D19 | length 2312.4
  Top Layer w6: v2(1610.04,1519.96) U1.D19@1629.72,1500.28
  MidLayer1 w6: J1.10@-64.37,1536.81 -25,1576.18 76.18,1576.18 155,1655 155,1838 309,1992 1341,1992 1590.35,1742.65 1590.35,1539.65 v2(1610.04,1519.96)
IO1-9: J1.11 U1.C20 | length 2136.6
  Top Layer w6: v2(1570.67,1559.33) U1.C20@1590.35,1539.65
  MidLayer1 w6: J1.11@14.37,1458.07 58.07,1458.07 215,1615 215,1823 330,1938 1320,1938 1531.3,1726.7 1531.3,1598.7 v2(1570.67,1559.33)
IO1-10: J1.12 U1.B22 | length 2146.9
  Top Layer w6: U1.B22@1550.98,1618.39 v2(1550.98,1670)
  MidLayer1 w6: J1.12@-64.37,1458.07 -25,1497.44 67.44,1497.44 195,1625 195,1828 323,1956 1327,1956 1550.98,1732.02 v2(1550.98,1670)
IO1-11: J1.13 U1.C19 | length 2184.9
  Top Layer w6: v2(1570.67,1519.96) U1.C19@1590.35,1500.28
  MidLayer1 w6: J1.13@14.37,1379.33 14.37,1384.37 235,1605 235,1818 337,1920 1313,1920 1491.93,1741.07 1491.93,1598.7 v2(1570.67,1519.96)
IO1-12: J1.15 U1.G7 | length 1940
  Top Layer w6: v2(1728.15,1047.52) U1.G7@1747.83,1027.83
  MidLayer1 w6: J1.15@14.37,1300.59 84.41,1300.59 392,993 1358,993 1432.2,1067.2 1522.2,1067.2 1560.89,1105.89 1607.11,1105.89 1665.48,1047.52 v2(1728.15,1047.52)
IO1-13: J1.16 U1.F7 | length 2017.9
  Top Layer w6: U1.F7@1708.46,1027.83 v2(1728.15,1008.15)
  MidLayer1 w6: J1.16@-64.37,1300.59 -25,1261.22 88.78,1261.22 375,975 1370,975 1442.52,1047.52 1542.52,1047.52 1562.2,1067.2 1618.8,1067.2 1658.17,1027.83 1708.46,1027.83 v2(1728.15,1008.15)
IO1-14: J1.17 U1.E6 | length 1810.1
  Top Layer w6: v2(1649.41,1008.15) U1.E6@1669.09,988.46
  MidLayer1 w6: J1.17@14.37,1221.85 98.15,1221.85 363,957 1382,957 1452.83,1027.83 1629.72,1027.83 v2(1649.41,1008.15)
IO1-15: J1.18 U1.H4 | length 2073.5
  Top Layer w6: v2(1767.52,890.04) U1.H4@1787.2,909.72
  MidLayer1 w6: J1.18@-64.37,1221.85 -25,1182.48 107.52,1182.48 351,939 1394,939 1463.15,1008.15 1611.85,1008.15 1652,968 1687,968 1705.91,949.09 1740.91,949.09 1767.52,922.48 v2(1767.52,890.04)
IO1-16: J1.19 U1.F5 | length 1846.7
  Top Layer w6: v2(1688.78,929.41) U1.F5@1708.46,949.09
  MidLayer1 w6: J1.19@14.37,1143.11 116.89,1143.11 339,921 1406,921 1473.46,988.46 1611.54,988.46 1645,955 1663.19,955 v2(1688.78,929.41)
IO1-17: J1.20 U1.E5 | length 1884.6
  Top Layer w6: v2(1649.41,929.41) U1.E5@1669.09,949.09
  MidLayer1 w6: J1.20@-64.37,1143.11 -25,1103.74 126.26,1103.74 327,903 1418,903 1483.78,968.78 1610.04,968.78 v2(1649.41,929.41)
IO1-18: J1.21 U1.D5 | length 1732.8
  Top Layer w6: v2(1610.32,929.41) U1.D5@1630,949.09
  MidLayer1 w6: J1.21@14.37,1064.37 135.63,1064.37 315,885 1430,885 1494.09,949.09 1590.63,949.09 v2(1610.32,929.41)
IO1-19: J1.22 U1.E4 | length 1888.6
  Top Layer w6: U1.E4@1669.09,909.72 v2(1688.78,890.04)
  MidLayer1 w6: J1.22@-64.37,1064.37 -25,1025 145,1025 303,867 1442,867 1484.72,909.72 1669.09,909.72 v2(1688.78,890.04)
IO1-20: J1.23 U1.B3 | length 1618.4
  Top Layer w6: v2(1531.3,890.04) U1.B3@1550.98,870.35
  MidLayer1 w6: J1.23@14.37,985.63 154.37,985.63 291,849 1454,849 1495.04,890.04 v2(1531.3,890.04)
IO1-21: J1.24 U1.B2 | length 1695.7
  Top Layer w6: v2(1531.3,850.67) U1.B2@1550.98,830.98
  MidLayer1 w6: J1.24@-64.37,985.63 -25,946.26 163.74,946.26 279,831 1511.63,831 v2(1531.3,850.67)
IO1-22: J1.25 U1.A2 | length 1545
  Top Layer w6: v2(1491.93,811.3) U1.A2@1511.61,830.98
  MidLayer1 w6: J1.25@14.37,906.89 173.11,906.89 267,813 1490.23,813 v2(1491.93,811.3)
IO1-23: J1.27 U1.C4 | length 1731.3
  Top Layer w6: v2(1570.67,890.04) U1.C4@1590.35,909.72
  MidLayer1 w6: J1.27@14.37,828.15 73.15,828.15 85,840 180,840 243,777 1458,777 1482,753 1518,753 1550.98,785.98 1550.98,870.35 v2(1570.67,890.04)
IO1-24: J1.28 U1.B1 | length 1679.4
  Top Layer w6: v2(1531.3,811.3) U1.B1@1550.98,791.61
  MidLayer1 w6: J1.28@-64.37,828.15 -25,867.52 110,867.52 182.48,867.52 255,795 1468.23,795 1471.61,791.61 1511.61,791.61 v2(1531.3,811.3)
IO1-25: J1.29 U1.D3 | length 1730.2
  Top Layer w6: v2(1610.04,850.67) U1.D3@1629.72,870.35
  MidLayer1 w6: J1.29@14.37,749.41 22.78,741 1442,741 1466,717 1541,717 1590,766 1590,830.63 v2(1610.04,850.67)
IO1-26: J1.30 U1.C3 | length 1793.3
  Top Layer w6: v2(1570.67,850.67) U1.C3@1590.35,870.35
  MidLayer1 w6: J1.30@-64.37,749.41 -25,788.78 196.22,788.78 226,759 1450,759 1474,735 1530,735 1570.67,775.67 v2(1570.67,850.67)
IO1-27: J1.31 U1.D2 | length 1819.4
  Top Layer w6: U1.D2@1629.72,830.98 v2(1649.41,850.67)
  MidLayer1 w6: J1.31@15.04,670 J1.31@14.37,670.67 16.7,673 234.37,673 266.37,705 1426,705 1450,681 1555,681 1670,796 1670,830.08 v2(1649.41,850.67)
IO1-28: J1.32 U1.E3 | length 1919.4
  Top Layer w6: v2(1649.41,890.04) U1.E3@1669.09,870.35
  MidLayer1 w6: J1.32@-64.37,670.67 -25,710.04 194.59,710.04 212.13,692.5 227.87,692.5 258.37,723 1434,723 1458,699 1548,699 1629.72,780.72 1629.72,870.35 v2(1649.41,890.04)
IO1-29: J1.33 U1.G4 | length 1935.3
  Top Layer w6: v2(1728.15,890.04) U1.G4@1747.83,909.72
  MidLayer1 w6: J1.33@14.37,591.93 205.3,591.93 282.37,669 1410,669 1434,645 1569,645 1708.46,784.46 1708.46,870.35 v2(1728.15,890.04)
IO1-30: J1.34 U1.F3 | length 1943.7
  Top Layer w6: v2(1688.78,850.67) U1.F3@1708.46,870.35
  MidLayer1 w6: J1.34@-64.37,591.93 -25,631.3 218.67,631.3 274.37,687 1418,687 1442,663 1562,663 1688.78,789.78 v2(1688.78,850.67)
IO1-31: J1.35 U1.G3 | length 1974.1
  Top Layer w6: U1.G3@1747.83,870.35 v2(1767.52,850.67)
  MidLayer1 w6: J1.35@14.37,513.19 183.19,513.19 260,590 315,590 358,633 1394,633 1418,609 1583,609 1767.52,793.52 v2(1767.52,850.67)
IO1-32: J1.36 U1.F2 | length 2038.2
  Top Layer w6: U1.F2@1708.46,830.98 v2(1728.15,850.67)
  MidLayer1 w6: J1.36@-64.37,513.19 -25,552.56 191.93,552.56 290.37,651 1402,651 1426,627 1576,627 1747.83,798.83 1747.83,830.98 v2(1728.15,850.67)
IO2-1: J2.3 U1.Y13 | length 1851.7
  Top Layer w6: U1.Y13@2259.65,1264.06 v2(2279.33,1244.37)
  MidLayer1 w6: v2(2279.33,1244.37) 2508.63,1244.37 2529,1224 2659,1224 2667.1,1232.1 2837.1,1232.1 2860,1255 2990,1255 3015,1280 3050,1280 3073,1257 3367,1257 3395,1285 3395,1450 3595,1650 3595,1713.66 3615,1733.66 3675,1733.66 J2.3@3714.37,1773.03
IO2-2: J2.4 U1.AB7 | length 1859
  Top Layer w6: U1.AB7@2338.39,1027.83 2450.17,1027.83 2510,968 2920,968 3002,1050 3260,1050 3560,1350 3560,1697.4 J2.4@3635.63,1773.03
IO2-3: J2.5 U1.W12 | length 1856.7
  Top Layer w6: v2(2201.28,1243.69) U1.W12@2220.28,1224.69 U1.W12@2220.96,1224
  MidLayer1 w6: v2(2201.28,1243.69) 2220.96,1224 2506,1224 2522,1208 2673,1208 2680,1215 2995,1215 3019,1239 3379,1239 3415,1275 3415,1445 3624.92,1654.92 3675,1654.92 J2.5@3714.37,1694.29
IO2-4: J2.6 U1.AB6 | length 1799.4
  Top Layer w6: U1.AB6@2338.39,988.46 2464.54,988.46 2503,950 2927,950 3009,1032 3277,1032 3580,1335 3580,1638.66 J2.6@3635.63,1694.29
IO2-5: J2.7 U1.U10 | length 1914.2
  Top Layer w6: U1.U10@2141.54,1145.94 v2(2161.22,1126.26)
  MidLayer1 w6: v2(2161.22,1126.26) 2180.91,1145.94 2225.94,1145.94 2265.31,1185.31 2493.69,1185.31 2500,1179 2542.87,1179 2566.87,1155 2905,1155 2925,1175 3375,1175 3455,1255 3455,1435 3596.18,1576.18 3675,1576.18 J2.7@3714.37,1615.55
IO2-6: J2.8 U1.Y12 | length 1667.5
  Top Layer w6: U1.Y12@2259.65,1224.69 v2(2279.33,1205)
  MidLayer1 w6: v2(2279.33,1205) 2500,1205 2513,1192 2682,1192 2690,1200 3005,1200 3026,1221 3391,1221 3435,1265 3435,1440 3600,1605 3625.08,1605 J2.8@3635.63,1615.55
IO2-7: J2.9 U1.Y10 | length 1755.7
  Top Layer w6: U1.Y10@2259.65,1145.94 v2(2279.33,1126.26)
  MidLayer1 w6: v2(2279.33,1126.26) 2368.74,1126.26 2395,1100 2842.53,1100 2862.03,1119.5 3379.5,1119.5 3495,1235 3495,1407.44 3585,1497.44 3675,1497.44 J2.9@3714.37,1536.81
IO2-8: J2.10 U1.Y11 | length 1672.5
  Top Layer w6: U1.Y11@2259.65,1185.32 v2(2279.33,1165.63)
  MidLayer1 w6: v2(2279.33,1165.63) 2305.86,1139.1 2895.9,1139.1 2896,1139 3046,1139 3051,1134 3079,1134 3095,1150 3380,1150 3475,1245 3475,1430 3581.81,1536.81 J2.10@3635.63,1536.81
IO2-9: J2.11 U1.Y9 | length 1750.5
  Top Layer w6: U1.Y9@2259.65,1106.57 v2(2279.33,1086.89)
  MidLayer1 w6: v2(2279.33,1086.89) 2299.02,1067.2 2362.8,1067.2 2396,1034 2954,1034 2990,1070 3390,1070 3535,1215 3535,1368.7 3585,1418.7 3675,1418.7 J2.11@3714.37,1458.07
IO2-10: J2.12 U1.V9 | length 1795.3
  Top Layer w6: v2(2161.22,1086.89) U1.V9@2180.91,1106.57
  MidLayer1 w6: v2(2161.22,1086.89) 2180.91,1106.57 2363.43,1106.57 2392.1,1077.9 2837.1,1077.9 2861.27,1053.73 2948.73,1053.73 3001,1106 3396,1106 3515,1225 3515,1388.07 3585,1458.07 J2.12@3635.63,1458.07
IO2-11: J2.13 U1.V7 | length 1796.2
  Top Layer w6: U1.V7@2180.91,1027.83 v2(2200.59,1008.15)
  MidLayer1 w6: v2(2200.59,1008.15) 2220.28,1027.83 2355.17,1027.83 2385,998 2968,998 3004,1034 3409,1034 3575,1200 3575,1329.96 3585,1339.96 3675,1339.96 J2.13@3714.37,1379.33
IO2-12: J2.14 U1.Y8 | length 1632.2
  Top Layer w6: U1.Y8@2259.65,1067.2 v2(2279.33,1047.52)
  MidLayer1 w6: v2(2279.33,1047.52) 2355,1047.52 2386.52,1016 2961,1016 2997,1052 3402,1052 3555,1205 3555,1349.33 3585,1379.33 J2.14@3635.63,1379.33
IO2-13: J2.16 U1.AA6 | length 1512.7
  Top Layer w6: U1.AA6@2299.02,988.46 2318.7,968.78 2459.22,968.78 2496,932 2934,932 3016,1014 3298.41,1014 3585,1300.59 J2.16@3635.63,1300.59
IO2-14: J2.17 U1.Y7 | length 1574.7
  Top Layer w6: U1.Y7@2259.65,1027.83 v2(2279.33,1008.15)
  MidLayer1 w6: v2(2279.33,1008.15) 2299.02,988.46 2376.54,988.46 2385,980 2975,980 3011,1016 3418.52,1016 3585,1182.48 3675,1182.48 J2.17@3714.37,1221.85
IO2-15: J2.18 U1.AB5 | length 1439.3
  Top Layer w6: U1.AB5@2338.39,949.09 2453.91,949.09 2489,914 2941,914 3023,996 3359.15,996 3585,1221.85 J2.18@3635.63,1221.85
IO2-16: J2.19 U1.Y6 | length 1543.7
  Top Layer w6: U1.Y6@2259.65,988.46 v2(2279.33,968.78)
  MidLayer1 w6: v2(2279.33,968.78) 2297.26,968.78 2300.89,972.41 2369.59,972.41 2380,962 2982,962 3018,998 3479.26,998 3585,1103.74 3675,1103.74 J2.19@3714.37,1143.11
IO2-17: J2.20 U1.AB4 | length 1405.3
  Top Layer w6: U1.AB4@2338.39,909.72 2468.28,909.72 2482,896 2948,896 3030,978 3419.89,978 3585,1143.11 J2.20@3635.63,1143.11
IO2-18: J2.21 U1.Y5 | length 1571.2
  Top Layer w6: v2(2239.96,968.78) U1.Y5@2259.65,949.09
  MidLayer1 w6: v2(2239.96,968.78) 2258.96,949.78 2295.23,949.78 2305.86,960.41 2364.62,960.41 2381.03,944 2989,944 3025,980 3540,980 3585,1025 3675,1025 J2.21@3714.37,1064.37
IO2-19: J2.22 U1.AA4 | length 1427
  Top Layer w6: U1.AA4@2299.02,909.72 2318.7,890.04 2462.96,890.04 2475,878 3398.63,878 3585,1064.37 J2.22@3635.63,1064.37
IO2-20: J2.23 U1.W6 | length 1605.9
  Top Layer w6: v2(2200.59,968.78) U1.W6@2220.28,988.46
  MidLayer1 w6: v2(2200.59,968.78) 2213.09,968.78 2244.09,937.78 2300.2,937.78 2310.83,948.41 2359.65,948.41 2382.06,926 2996,926 3032,962 3569.26,962 3585,946.26 3605,946.26 3675,946.26 J2.23@3714.37,985.63
IO2-21: J2.24 U1.AB3 | length 1353.6
  Top Layer w6: U1.AB3@2338.39,870.35 2457.65,870.35 2468,860 3459.37,860 3585,985.63 J2.24@3635.63,985.63
IO2-22: J2.25 U1.Y4 | length 1486.5
  Top Layer w6: U1.Y4@2259.65,909.72 v2(2279.33,890.04)
  MidLayer1 w6: v2(2279.33,890.04) 2282.96,886.41 2343.59,886.41 2360,870 3677.48,870 J2.25@3714.37,906.89
IO2-23: J2.26 U1.AB2 | length 1328.7
  Top Layer w6: U1.AB2@2338.39,830.98 2365,830.98 2376.02,842 3520.11,842 3585,906.89 J2.26@3635.63,906.89
IO2-24: J2.27 U1.W4 | length 1560.5
  Top Layer w6: U1.W4@2220.28,909.72 v2(2239.96,890.04)
  MidLayer1 w6: v2(2239.96,890.04) 2260,870 2330,870 2348,852 3388,852 3451.22,788.78 3675,788.78 J2.27@3714.37,828.15
IO2-25: J2.28 U1.AA2 | length 1351.7
  Top Layer w6: U1.AA2@2299.02,830.98 2318.7,811.3 2371.3,811.3 2384,824 3631.48,824 J2.28@3635.63,828.15
IO2-26: J2.30 U1.V2 | length 1552.4
  Top Layer w6: U1.V2@2180.91,830.98 2200.59,811.3 2200.59,784.41 2225,760 2237.09,747.93 2352.93,747.93 2411,806 3528.41,806 3585,749.41 J2.30@3635.63,749.41
IO2-27: J2.31 U1.Y3 | length 1539.9
  Top Layer w6: U1.Y3@2259.65,870.35 v2(2279.33,850.67)
  MidLayer1 w6: v2(2279.33,850.67) 2299.02,830.98 2325.98,830.98 2329,834 3381,834 3504.96,710.04 3585,710.04 3675,710.04 J2.31@3714.37,670.67
IO2-28: J2.32 U1.V1 | length 1553.8
  Top Layer w6: U1.V1@2180.91,791.61 2180.91,787.12 2236.03,732 2362,732 2418,788 3467.67,788 3585,670.67 J2.32@3635.63,670.67
IO2-29: J2.33 U1.Y2 | length 1557.6
  Top Layer w6: U1.Y2@2259.65,830.98 v2(2279.33,811.3)
  MidLayer1 w6: v2(2279.33,811.3) 2351.3,811.3 2356,816 3374,816 3558.7,631.3 3675,631.3 J2.33@3714.37,591.93
IO2-30: J2.34 U1.W3 | length 1567.5
  Top Layer w6: U1.W3@2220.28,870.35 v2(2239.96,850.67)
  MidLayer1 w6: v2(2239.96,850.67) 2260,830.63 2260,803.76 2272.15,791.61 2328.39,791.61 2347.39,772.61 2377.61,772.61 2403,798 3367,798 3573.07,591.93 J2.34@3635.63,591.93
IO2-31: J2.35 U1.Y1 | length 1593.2
  Top Layer w6: U1.Y1@2259.65,791.61 v2(2279.33,771.93)
  MidLayer1 w6: v2(2279.33,771.93) 2299.26,752 2380,752 2408,780 3360,780 3587.44,552.56 3675,552.56 J2.35@3714.37,513.19
IO2-32: J2.36 U1.U1 | length 1649.2
  Top Layer w6: U1.U1@2141.54,791.61 2219.15,714 2449,714 2470,735 v2(2500,735)
  MidLayer1 w6: v2(2500,735) 2940,735 2967,762 3353,762 3601.81,513.19 J2.36@3635.63,513.19
IO2-33: J2.37 U1.T2 | length 1832.7
  Top Layer w6: U1.T2@2102.17,830.98 2121.85,811.3 2121.85,783.15 2209,696 2459,696 v2(2480,717)
  MidLayer1 w6: v2(2480,717) 2947,717 2974,744 3346,744 3616.18,473.82 3675,473.82 J2.37@3714.37,434.45
IO2-34: J2.38 U1.T1 | length 1731.8
  Top Layer w6: U1.T1@2102.17,791.61 2102.17,770 2194.17,678 2479,678 v2(2500,699)
  MidLayer1 w6: v2(2500,699) 2954,699 2981,726 3339,726 3630.55,434.45 J2.38@3633.58,434.45
IO2-35: J2.39 U1.W1 | length 1714.5
  Top Layer w6: U1.W1@2220.28,791.61 v2(2244.96,766.93)
  MidLayer1 w6: v2(2244.96,766.93) 2271.89,740 2375,740 2434,681 2961,681 2988,708 3332,708 3595,445 3595,415.08 3615,395.08 3675,395.08 J2.39@3714.37,355.71